# Altium PCB EP_PCBnoPP.PcbDoc
Units mil, origin at the board's own origin, x right, y up, seen from the top; angles counter-clockwise.
Board outline 4724.41 x 4724.41 mil, 4 copper layers (Top Layer 1, Top Layer, Bottom Layer, Bottom Layer 1), stack 74.148 mil thick; 51 components, 36 nets, 161 pads, 56 vias.
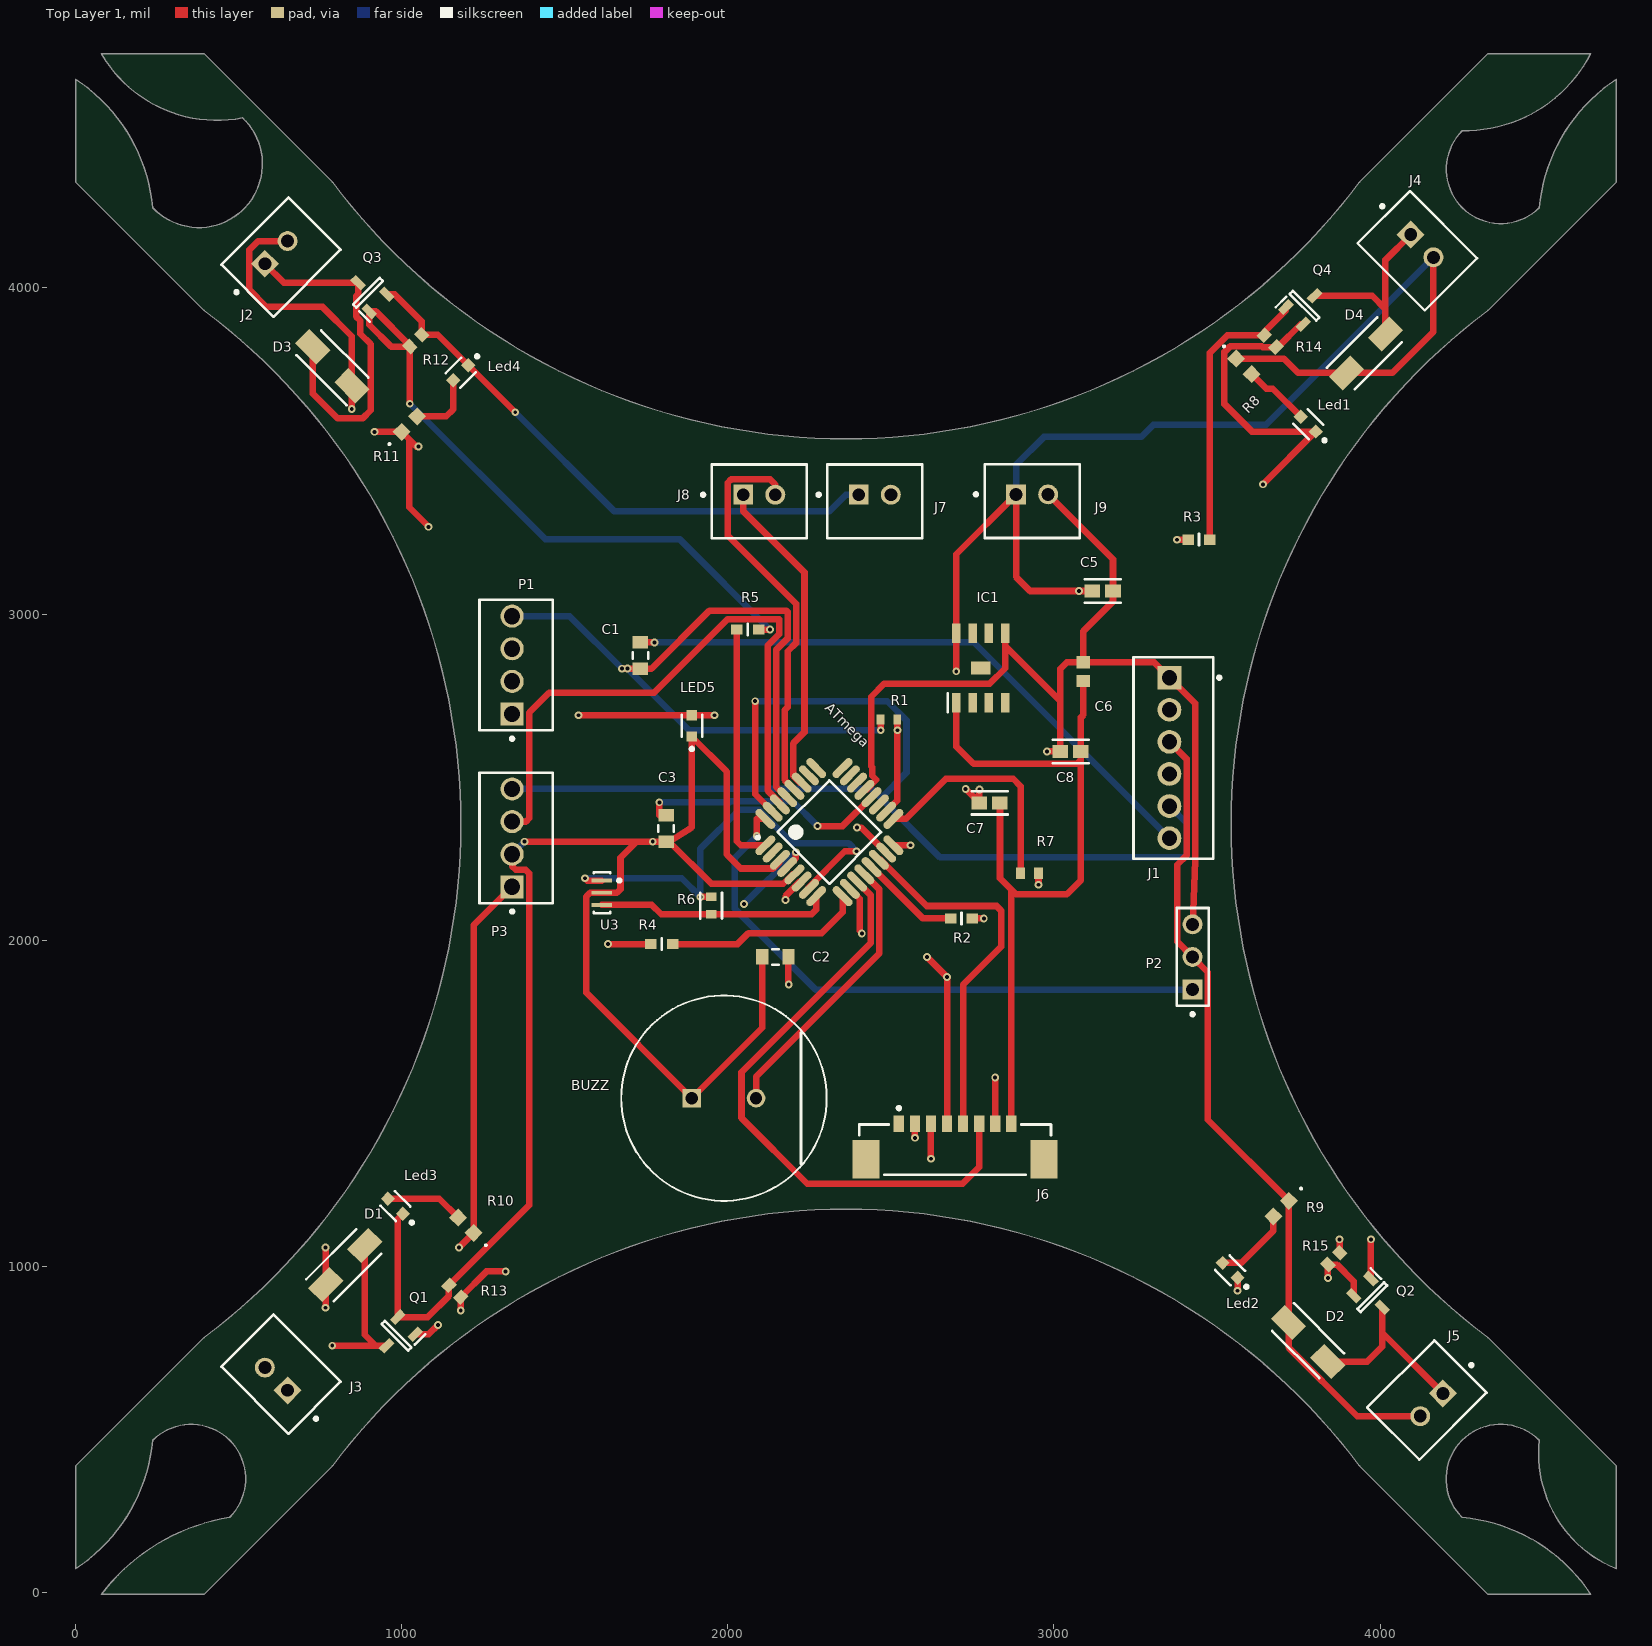
[diagram p0: Top Layer 1 view]
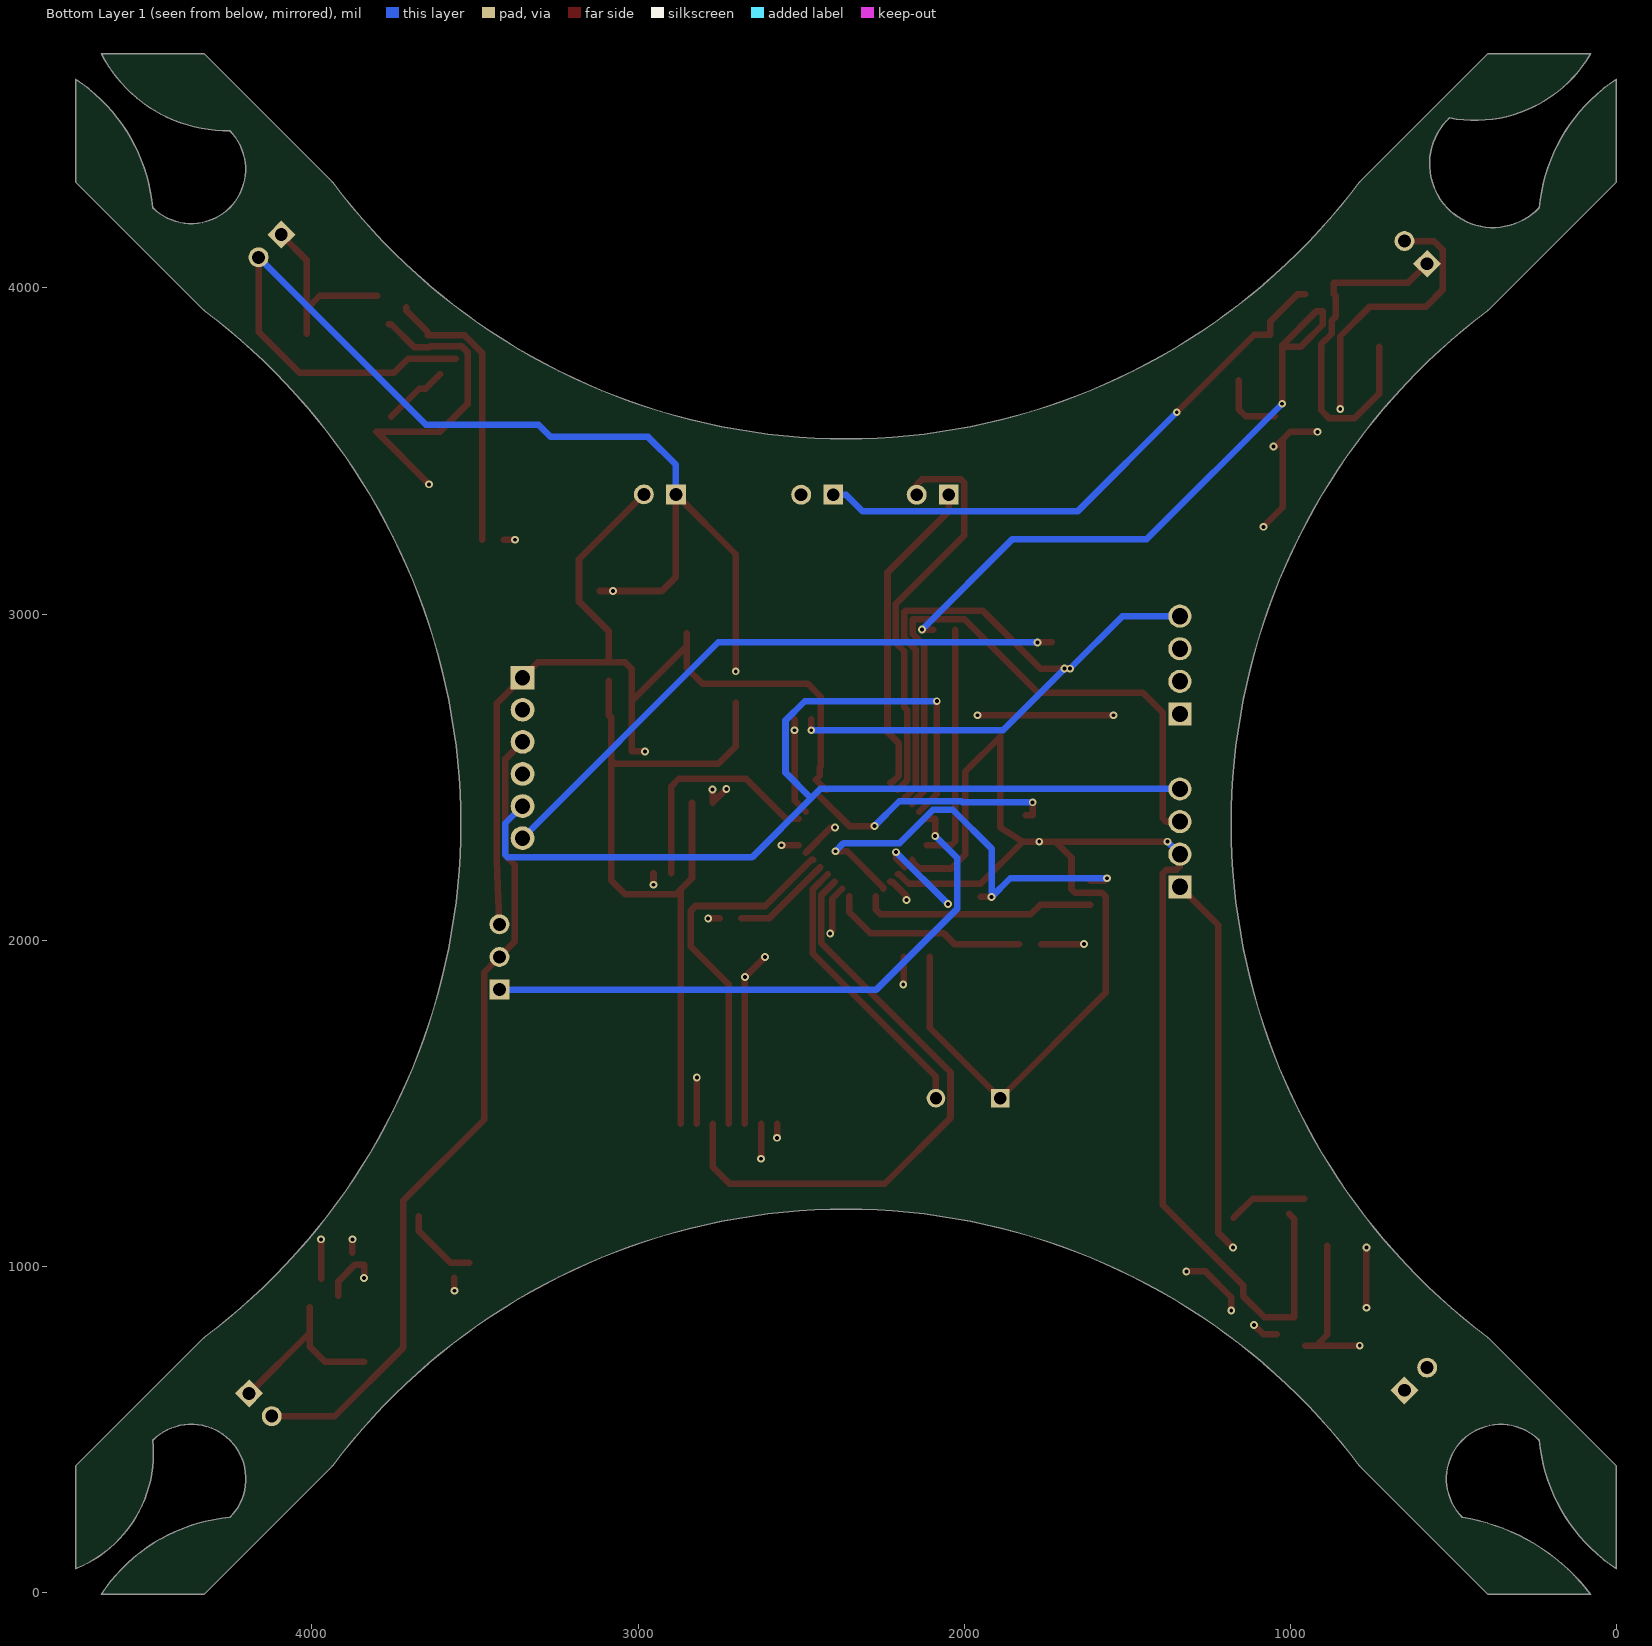
[diagram p1: Bottom Layer 1 view, seen from below]
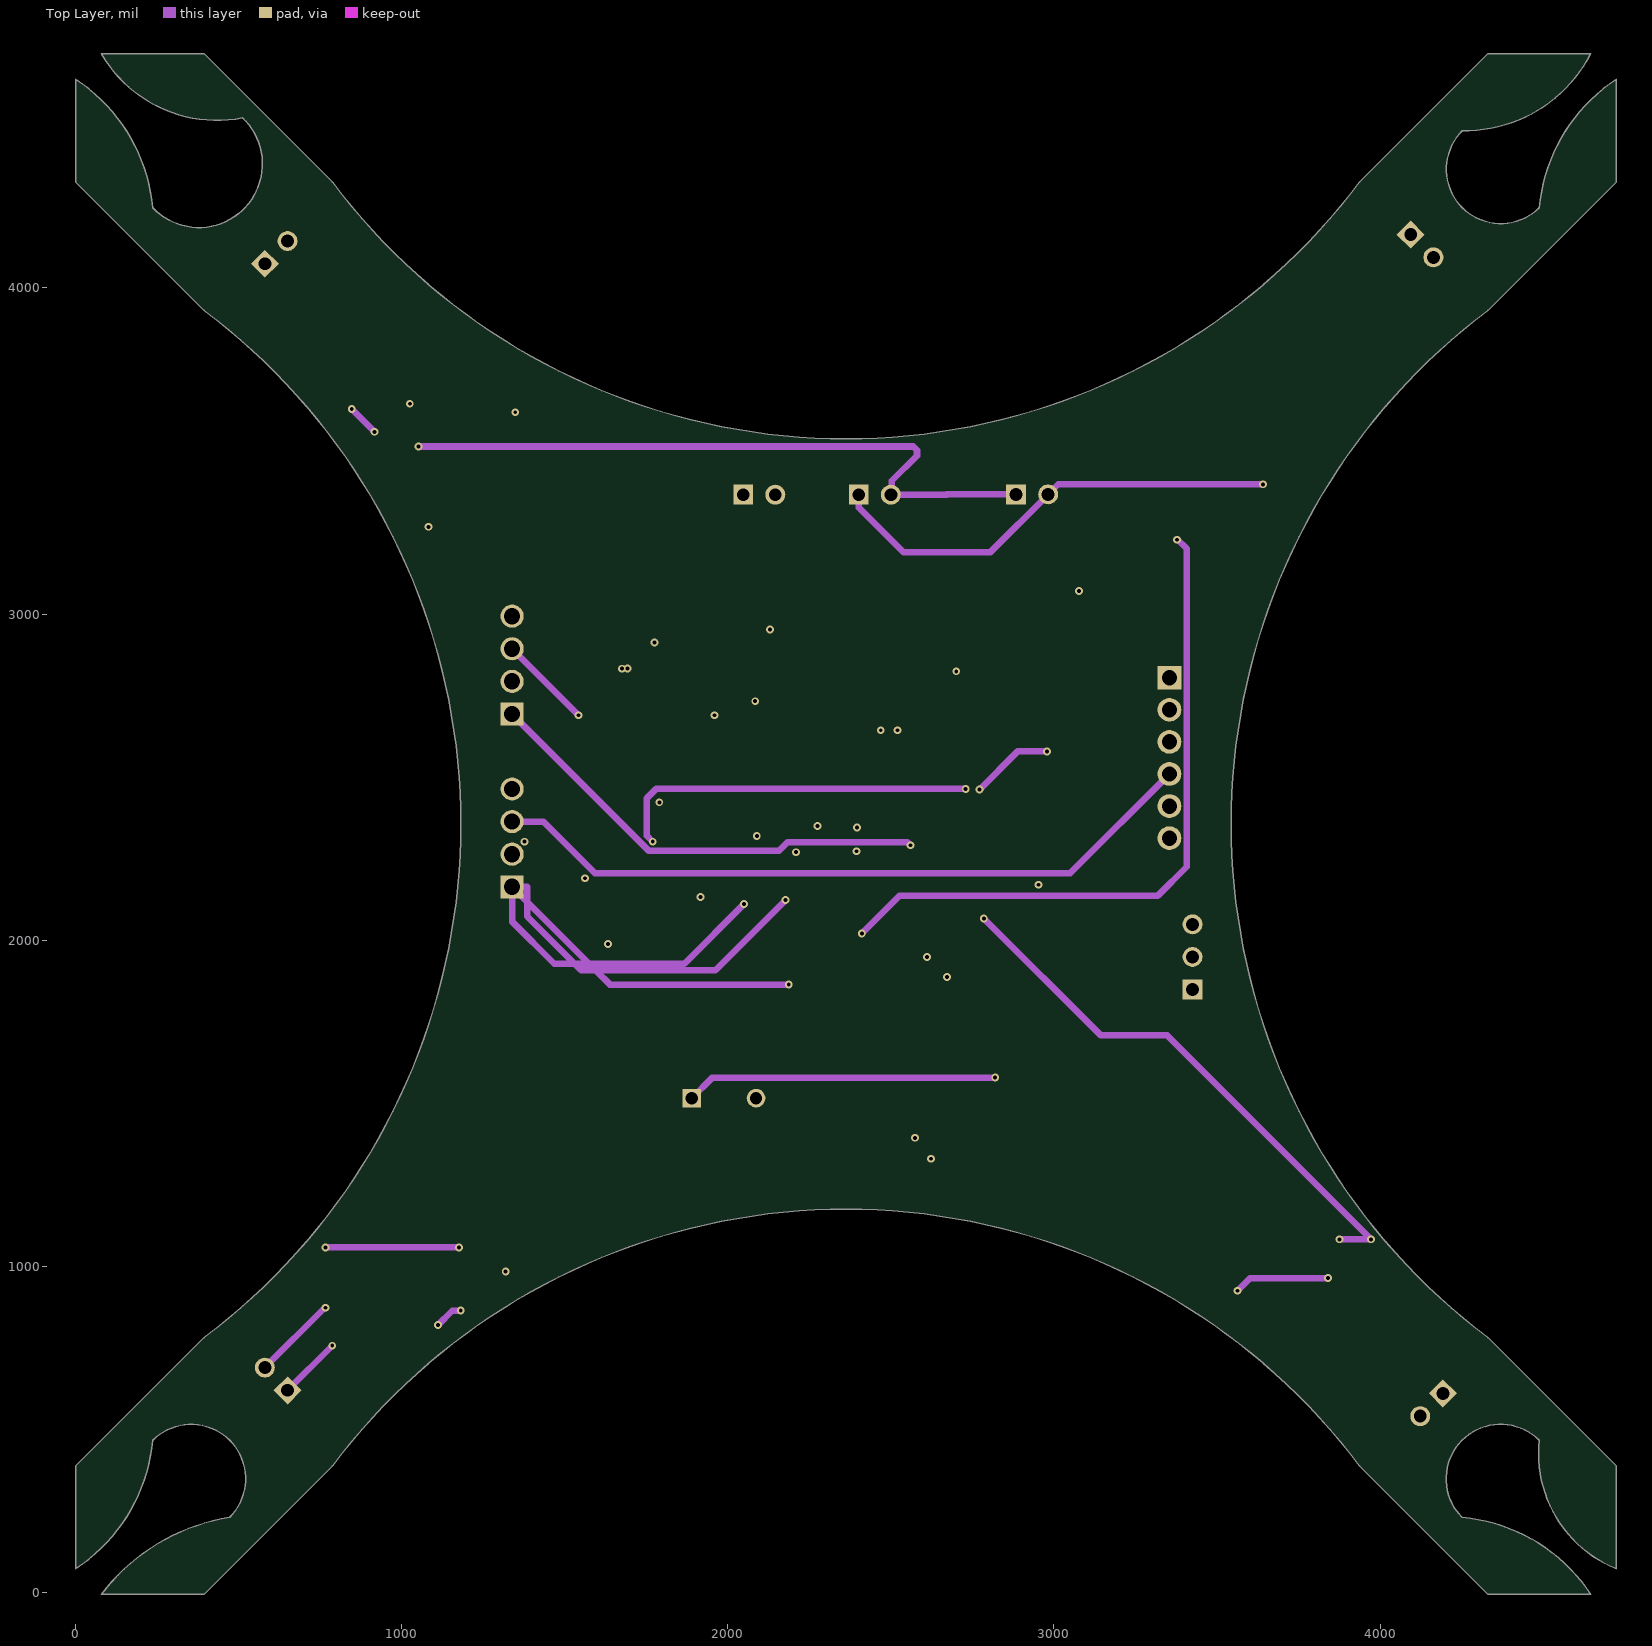
[diagram p2: Top Layer]
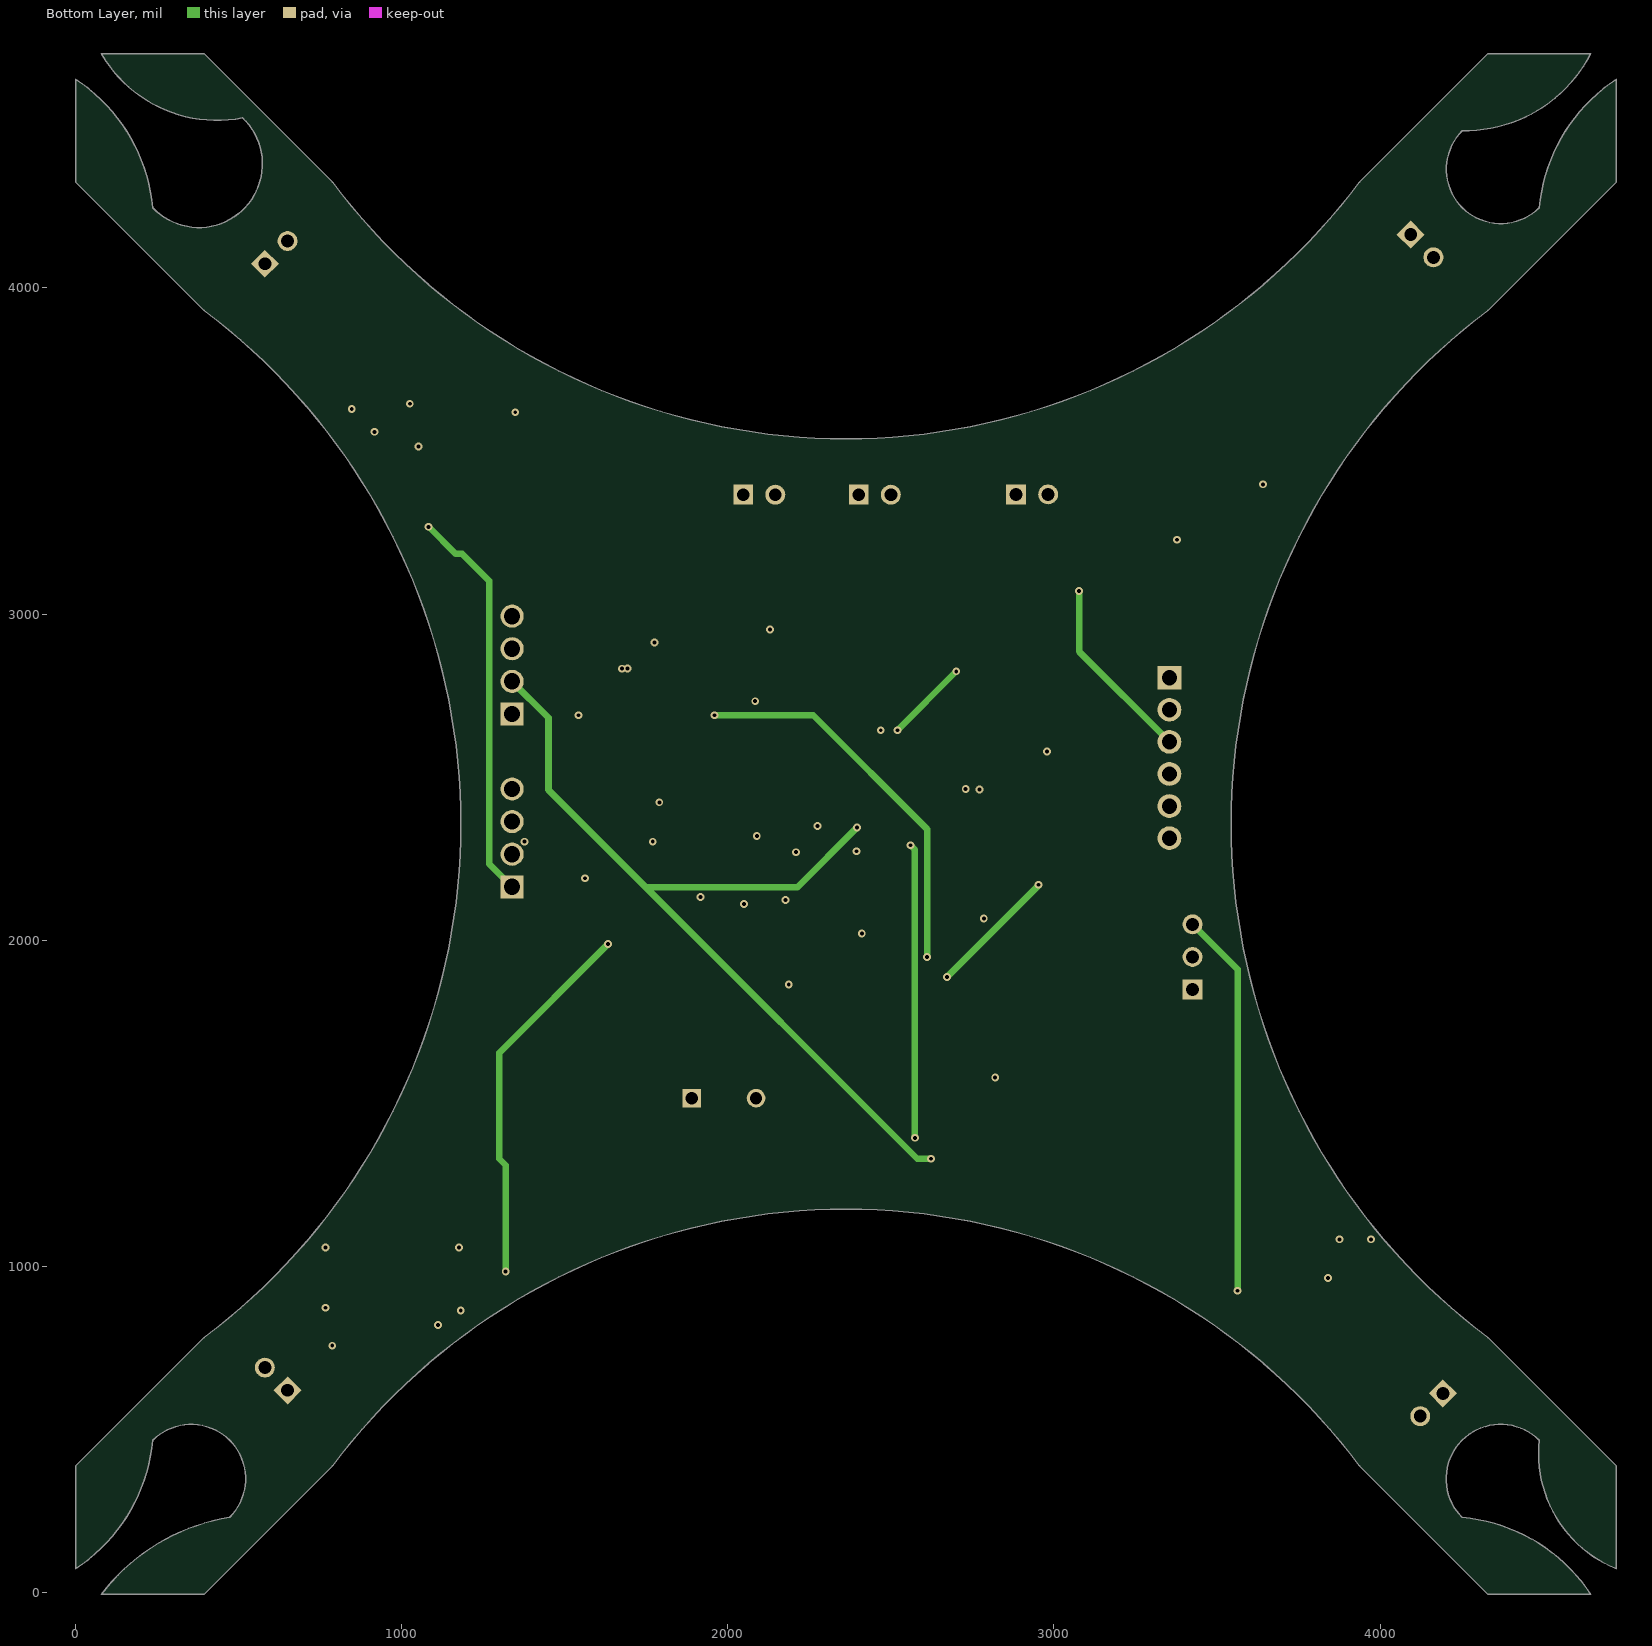
[diagram p3: Bottom Layer]
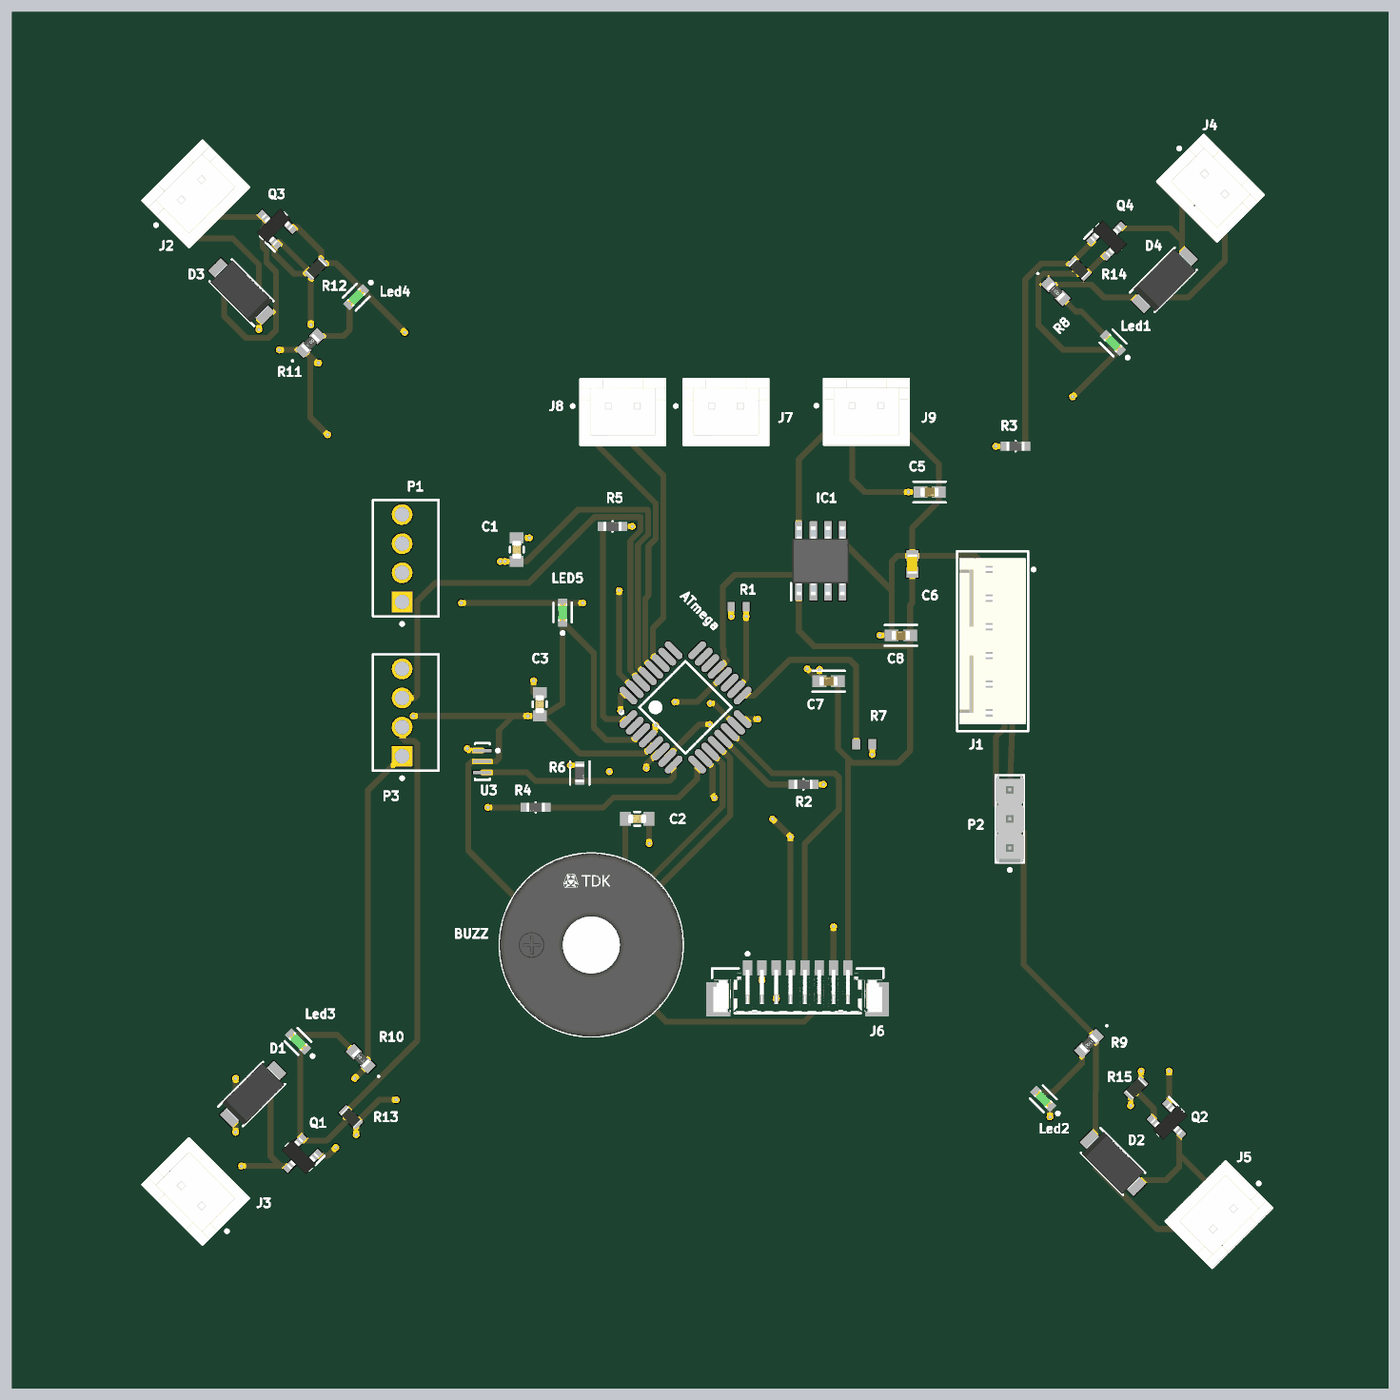
[diagram p4: 3D render of the assembled board from above, using the file's embedded part models]

## Layer stack, top to bottom
Top Solder: solder mask 1, SM-002, Dk 4
Top Layer 1: signal copper 1.378
Dielectric 2: prepreg 2.8, PP-006, Dk 4.1
Top Layer: signal copper 1.4
Dielectric 1: dielectric 62.992, FR-4, Dk 4.8
Bottom Layer: signal copper 1.4
Dielectric 3: prepreg 2.8, PP-006, Dk 4.1
Bottom Layer 1: signal copper 1.378
Bottom Solder: solder mask 1, SM-002, Dk 4

## Board outline
78.99,-5.81 cw(c571.12,-379.83) 472.69,230.41 ccw(c354.58,348.52) 236.47,466.63 cw(c-289.4,514.43) 0.25,72.93 0.25,387.89 393.95,781.59 ccw(c-787.15,2356.39) 393.95,3931.19 0.25,4324.9 0.25,4639.86 cw(c-289.4,4198.35) 236.47,4246.16 ccw(c378.01,4380.2) 512.06,4521.75 cw(c433.32,4923.32) 78.99,4718.6 393.95,4718.6 787.65,4324.9 ccw(c2362.45,5506) 3937.26,4324.9 4330.96,4718.6 4645.92,4718.6 cw(c4259.31,4916.75) 4252.22,4482.38 ccw(c4370.33,4364.27) 4488.44,4246.16 cw(c5014.31,4198.35) 4724.66,4639.86 4724.66,4324.9 4330.96,3931.19 ccw(c5512.06,2356.39) 4330.96,781.59 4724.66,387.89 4724.66,72.93 cw(c4866.03,425.47) 4488.44,466.63 ccw(c4369.97,348.52) 4251.86,230.05 cw(c4206.28,-293.23) 4645.92,-5.81 4330.96,-5.81 3937.26,387.89 ccw(c2362.45,-793.21) 787.65,387.89 393.95,-5.81

## Design rules (kind name [scope] priority, off if disabled: settings)
Clearance [All] p1: gap=6 ignorepadtopadclearanceinfootprint=FALSE
PolygonConnect [All] p1: connectstyle=Relief reliefconductorwidth=10 reliefentries=4 polygonreliefangle="90 Angle" airgapwidth=10
RoutingVias [All] p1: holewidth=12 width=24 viastyle="Through Hole" minholewidth=12 minwidth=24 maxholewidth=12 maxwidth=24
SolderMaskExpansion [All] p1: expansion=4 istentingtop=FALSE
SupplyNets "Schematic Supply Nets_2" [InNet('3.3v')] p1: voltage=0.000
SupplyNets "Schematic Supply Nets_1" [InNet('VCC')] p2: voltage=0.000
SupplyNets "Schematic Supply Nets" [InNet('GND')] p3: voltage=0.000
Width [All] p1: maxlimit=40 minlimit=12 preferedwidth=20
30 further rules are at their usual default settings.

## Components (designator, comment, footprint, x,y, rotation, side; value= is the part's Value field where it differs from the comment)
ATmega "ATmega328P-AU" 32A_M 2311.49,2331.59 r45 top (schematic designator U2)
BUZZ "SDC1610M5-01" FP-SDC1610M5-01-MFG 1988.19,1515.75 r0 top (schematic designator LS1)
C1 "CGA3E2X7R1H104K080AA" FP-CGA3E-0_3-0_1-IPC_A 1732.28,2873.03 r270 top
C2 "CGA3E2X7R1H104K080AA" FP-CGA3E-0_3-0_1-IPC_A 2145.67,1948.82 r180 top
C3 "CGA3E2X7R1H104K080AA" FP-CGA3E-0_3-0_1-IPC_A 1811.02,2342.52 r90 top
C5 "GRM188R60J106ME47D" FP-GRM188-0_1-e0_2_0_55-IPC_A 3149.61,3070.87 r0 top
C6 "GRM188R71H104KA93D" CAPC1608X90X35ML10T15 3090.55,2823.82 r270 top
C7 "GRM188R60J106ME47D" FP-GRM188-0_1-e0_2_0_55-IPC_A 2803.08,2421.26 r180 top
C8 "GRM188R60J106ME47D" FP-GRM188-0_1-e0_2_0_55-IPC_A 3051.18,2578.74 r180 top
D1 "SS12" DIOM5227X250N 826.77,1003.94 r45 top
D2 "SS12" DIOM5227X250N 3779.53,767.72 r315 top
D3 "SS12" DIOM5227X250N 787.4,3759.84 r135 top
D4 "SS12" DIOM5227X250N 3956.69,3799.21 r45 top
IC1 "HT7333-1" SOIC127P600X175-9N 2775.59,2834.65 r90 top
J1 "22-04-1061" FP-22-04-1061-MFG 3366.14,2559.06 r90 top
J2 "B2B-XH-A(LF)(SN)" FP-B2B-XH-A_LF_SN-MFG 629.92,4094.49 r45 top
J3 "B2B-XH-A(LF)(SN)" FP-B2B-XH-A_LF_SN-MFG 629.92,669.29 r135 top
J4 "B2B-XH-A(LF)(SN)" FP-B2B-XH-A_LF_SN-MFG 4114.17,4114.17 r315 top
J5 "B2B-XH-A(LF)(SN)" FP-B2B-XH-A_LF_SN-MFG 4143.5,590.05 r225 top
J6 "53398-0871" FP-53398-0871-MFG 2696.85,1358.27 r180 top
J7 "B2B-XH-A(LF)(SN)" FP-B2B-XH-A_LF_SN-MFG 2450.79,3345.47 r0 top
J8 "B2B-XH-A(LF)(SN)" FP-B2B-XH-A_LF_SN-MFG 2096.46,3345.47 r0 top
J9 "B2B-XH-A(LF)(SN)" FP-B2B-XH-A_LF_SN-MFG 2933.07,3346.46 r0 top
Led1 "SML-D12U8WT86C" FP-SML-D12-MFG 3779.53,3582.68 r135 top
Led2 "SML-D12U8WT86C" FP-SML-D12-MFG 3540.03,987.53 r135 top
Led3 "SML-D12U8WT86C" FP-SML-D12-MFG 980.97,1184.38 r135 top
Led4 "SML-D12U8WT86C" FP-SML-D12-MFG 1181.1,3740.16 r225 top
LED5 "SML-D12U8WT86C" FP-SML-D12-MFG 1889.76,2657.48 r90 top
P1 "640456-4" TECO-640456-4 1338.58,2843.7 r270 top
P2 "22-28-4033" MOLX-22-28-4033_V 3425.2,1948.82 r90 top
P3 "640456-4" TECO-640456-4 1338.58,2313.78 r270 top
Q1 "SI2302-TP" SOT95P237X125-3N 984.25,787.4 r225 top
Q2 "SI2302-TP" SOT95P237X125-3N 3976.38,905.51 r315 top
Q3 "SI2302-TP" SOT95P237X125-3N 896.77,3985.12 r135 top
Q4 "SI2302-TP" SOT95P237X125-3N 3768.59,3945.75 r45 top
R1 "RC0603FR-1010KL" RESC1608X55X25LL10T15 2494.09,2677.17 r0 top
R2 "RC0603FR-07100RL" FP-RC0603-0_55-MFG 2716.54,2066.93 r0 top
R3 "RC0603FR-07100RL" FP-RC0603-0_55-MFG 3444.88,3228.35 r0 top
R4 "RC0603FR-07100RL" FP-RC0603-0_55-MFG 1797.24,1988.19 r180 top
R5 "RC0603FR-07100RL" FP-RC0603-0_55-MFG 2061.02,2952.76 r0 top
R6 "RC0603JR-071ML" FP-RC0603-0_55-IPC_C 1948.82,2106.3 r270 top
R7 "RC0603FR-07330RL" RESC1608X55X25NL10T15 2925.2,2204.72 r0 top
R8 "TFCR0603-16W-E-3300BT" TFCR0603 3582.68,3759.84 r315 top
R9 "TFCR0603-16W-E-3300BT" TFCR0603 3696.81,1177.12 r225 top
R10 "TFCR0603-16W-E-3300BT" TFCR0603 1196.81,1126.03 r135 top
R11 "TFCR0603-16W-E-3300BT" TFCR0603 1023.62,3582.68 r45 top
R12 "CRCW060310K0FKEA" RESC1609X50X30NL8T20 1043.31,3838.58 r45 top
R13 "CRCW060310K0FKEA" RESC1609X50X30NL8T20 1163.01,923.61 r135 top
R14 "CRCW060310K0FKEA" RESC1609X50X30NL8T20 3663.01,3836.99 r315 top
R15 "CRCW060310K0FKEA" RESC1609X50X30NL8T20 3858.27,1023.62 r225 top
U3 "CSTCE16M0V53-R0" MURA-CSTCE_V-3_V 1614.17,2145.67 r270 top

## Footprints (in the part's own frame and the unit in brackets; to place one, negate y for a bottom-side part, rotate by r counter-clockwise, add the part's x,y. Pads: shape width x height; smd on the part's side, far side on the other; paste and mask are expansions set on the pad)
32A_M [mm] "Thin QFP, 32-Leads, Body 7x7mm, Pitch 0.8mm, IPC Low Density"
  oval 1.95x0.6 smd: 1(-4.25,2.8) 2(-4.25,2) 3(-4.25,1.2) 4(-4.25,0.4) 5(-4.25,-0.4) 6(-4.25,-1.2) 7(-4.25,-2) 8(-4.25,-2.8) 17(4.25,-2.8) 18(4.25,-2) 19(4.25,-1.2) 20(4.25,-0.4) 21(4.25,0.4) 22(4.25,1.2) 23(4.25,2) 24(4.25,2.8)
  oval 0.6x1.95 smd: 9(-2.8,-4.25) 10(-2,-4.25) 11(-1.2,-4.25) 12(-0.4,-4.25) 13(0.4,-4.25) 14(1.2,-4.25) 15(2,-4.25) 16(2.8,-4.25) 25(2.8,4.25) 26(2,4.25) 27(1.2,4.25) 28(0.4,4.25) 29(-0.4,4.25) 30(-1.2,4.25) 31(-2,4.25) 32(-2.8,4.25)
  silkscreen extent -4.37,-2.85 2.85,3.77, body extent -3.5,-3.5 3.5,3.5, height 1.2
CAPC1608X90X35ML10T15 [mm] "Chip Capacitor, 2-Leads, Body 1.7x0.9mm, IPC Low Density"
  rect 0.95x1.05 smd: 1(-0.725,0) 2(0.725,0)
  body extent -0.85,-0.45 0.85,0.45, height 0.9
DIOM5227X250N [mm]
  rect 2.35x1.55 smd: 1(-2.15,0) 2(2.15,0)
  silkscreen extent -2.93,-1.36 2.6,1.36, body extent -2.6,-1.36 2.6,1.36, height 2.5
FP-22-04-1061-MFG [mm]
  rect 1.85x1.85 hole 1.2 paste-2539.97 mask+0: 1(6.25,0.3)
  round 1.85 hole 1.2 paste-2539.97 mask+0: 2(3.75,0.3) 3(1.25,0.3) 4(-1.25,0.3) 5(-3.75,0.3) 6(-6.25,0.3)
  silkscreen extent -7.85,-3.7 7.85,3.1, body extent -7.95,-3.2 7.95,3.2, height 0.25
FP-53398-0871-MFG [mm]
  rect 0.8x1.3 smd paste+0 mask+0: 1(4.375,-2) 2(3.125,-2) 3(1.875,-2) 4(0.625,-2) 5(-0.625,-2) 6(-1.875,-2) 7(-3.125,-2) 8(-4.375,-2)
  rect 2.1x3 smd paste+0 mask+0: 9(-6.925,0.75) 10(6.925,0.75)
  silkscreen extent -7.48,-3.35 7.48,1.95, body extent -8.08,-2.75 8.08,2.35, height 0.25
FP-B2B-XH-A_LF_SN-MFG [mm]
  rect 1.55x1.55 hole 1 paste-2539.97 mask+0: 1(-1.25,0.525)
  round 1.55 hole 1 paste-2539.97 mask+0: 2(1.25,0.525)
  silkscreen extent -4.5,-2.88 3.7,2.88, body extent -3.8,-2.98 3.8,2.98, height 0.25
FP-CGA3E-0_3-0_1-IPC_A [mm]
  rect 0.956x1.206 smd paste+0 mask+0: 1(-1.025,0) 2(1.025,0)
  silkscreen extent -0.25,-0.6 0.25,0.6, body extent -2,-1.1 2,1.1, height 0.25
FP-GRM188-0_1-e0_2_0_55-IPC_A [mil]
  rect 47.57x39.85 smd paste+0 mask+0: 1(-31.57,0) 2(31.57,0)
  silkscreen extent -55,-36 55,36, body extent -75,-40 75,40, height 10
FP-RC0603-0_55-IPC_C [mil]
  rect 25.93x31.97 smd paste+0 mask+0: 1(-26.64,0) 2(26.64,0)
  silkscreen extent -40,-33 40,33, body extent -44,-22 44,22, height 10
FP-RC0603-0_55-MFG [mm]
  rect 0.9x0.8 smd paste+0 mask+0: 1(-0.85,0) 2(0.85,0)
  silkscreen extent 0,-0.45 0,0.45, body extent -1.4,-0.55 1.4,0.55, height 0.25
FP-SDC1610M5-01-MFG [mm]
  rect 1.45x1.45 hole 0.95 paste-2539.97 mask+0: 1(-2.5,0)
  round 1.45 hole 0.95 paste-2539.97 mask+0: 2(2.5,0)
  silkscreen extent -8,-8 8,8, body extent -8.1,-8.1 8.1,8.1, height 0.25
FP-SML-D12-MFG [mm]
  rect 0.8x0.8 smd paste+0 mask+0: 1(-0.825,0) 2(0.825,0)
  silkscreen extent -1.92,-0.8 0.85,0.8, body extent -1.33,-0.55 1.33,0.55, height 0.25
MOLX-22-28-4033_V [mm] "THD, 3-Leads, Body 7.62x2.49mm, Pitch 2.54mm"
  rect 1.55x1.55 hole 1.02: 1(-2.54,0)
  round 1.55 hole 1.02: 2(0,0) 3(2.54,0)
  silkscreen extent -4.58,-1.24 3.81,1.24, body extent -3.81,-1.24 3.81,1.24, height 8.38
MURA-CSTCE_V-3_V [mm] "SMD, 3-Leads, Body 3.2x1.3mm, Pitch 0.95mm"
  rect 0.3x1.6 smd: 1(-0.95,0) 2(0,0) 3(0.95,0)
  silkscreen extent -1.6,-0.65 1.6,1.48, body extent -1.6,-0.65 1.6,0.65, height 1
RESC1608X55X25LL10T15 [mm] "Chip Resistor, 2-Leads, Body 1.60x0.80mm, IPC High Density"
  rect 0.6x0.8 smd: 1(-0.65,0) 2(0.65,0)
  body extent -0.85,-0.45 0.85,0.45, height 0.55
RESC1608X55X25NL10T15 [mm] "Chip Resistor, 2-Leads, Body 1.70x0.90mm, IPC Medium Density"
  rect 0.7x0.9 smd: 1(-0.7,0) 2(0.7,0)
  body extent -0.85,-0.45 0.85,0.45, height 0.55
RESC1609X50X30NL8T20 [mm] "Chip Resistor, 2-Leads, Body 1.65x0.95mm, IPC Medium Density"
  rect 0.8x0.95 smd: 1(-0.65,0) 2(0.65,0)
  body extent -0.82,-0.47 0.82,0.47, height 0.5
SOIC127P600X175-9N [mm]
  rect 1.5x0.65 smd: 1(-2.7,1.905) 2(-2.7,0.635) 3(-2.7,-0.635) 4(-2.7,-1.905) 5(2.7,-1.905) 6(2.7,-0.635) 7(2.7,0.635) 8(2.7,1.905)
  rect 1x1.5 smd: 9(0,0)
  silkscreen extent -3.45,2.58 -1.95,2.58, body extent -3,-2.45 3,2.45, height 1.75
SOT95P237X125-3N [mm]
  rect 1.15x0.6 smd: 1(-1.1,0.95) 2(-1.1,-0.95) 3(1.1,0)
  silkscreen extent -1.68,-1.46 0.18,1.5, body extent -1.25,-1.5 1.25,1.5, height 1.07
TECO-640456-4 [mm] "Through Hole, 4-Leads, Body 10.16x5.72mm, Pitch 2.54mm"
  rect 1.8x1.8 hole 1.27 paste-2539.97: 1(3.81,0)
  round 1.8 hole 1.27 paste-2539.97: 2(1.27,0) 3(-1.27,0) 4(-3.81,0)
  silkscreen extent -5.08,-2.54 5.86,3.18, body extent -5.08,-2.54 5.08,3.18, height 10.03
TFCR0603 [mm]
  rect 1x1 smd: 1(-0.85,0) 2(0.85,0)
  silkscreen extent -2.25,-0.05 -2.15,0.05, body extent -0.77,-0.39 0.77,0.39, height 0.46

## Part data
ATmega: library part CMP-0095-00269-2, "8-bit AVR Microcontroller, 32KB Flash, 1KB EEPROM, 2KB SRAM, 32-pin TQFP, Industrial Grade (-40°C to 85°C)", Code_JEDEC=MS-026-ABA, ComponentLink1Description="Manufacturer URL", ComponentLink1URL=http://www.atmel.com/, ComponentLink2Description="ATmega48A/48PA/88A/88PA/168A/168PA/328/328P Datasheet", ComponentLink2URL=http://www.atmel.com/dyn/resources/prod_documents/doc8271.pdf, ComponentLink3Description="ATmega48A/48PA/88A/88PA/168A/168PA/328/328P Summary", ComponentLink3URL=http://www.atmel.com/dyn/resources/prod_documents/8271S.pdf, DatasheetVersion="revD, May-2011", PackageDescription="32-Lead, 7x7x1.0 mm Body, 0.8mm Lead Pitch, Thin Profile Plastic Quad Flat Package (TQFP)", PackageReference=32A, PackageVersion="revC, Oct-2010", RevisionNote="DatasheetVersion & PackageVersion updated. URLs added."
BUZZ: library part CMP-08413-000008-1, "AUDIO MAGNETIC INDICATOR 4-8V TH", Frequency=2.4kHz, Max Operating Temperature=70°C, Max Supply Current=30mA, Min Operating Temperature=-10°C, Nominal Supply Voltage (DC)=5V, Diameter=16mm, Height=10mm, Input Type=DC, Lead Free="Lead Free", Mount="Through Hole", Number of Pins=2, Number of Terminals/Pins=2, Operating Supply Current=30mA, Packaging=Tray, Sensing Method=Magnetic, Series=SDC, Termination="PC Pins", Voltage Rating=5V
C1 C2 C3: library part CMP-2000-07546-2, "Cap Ceramic 100nF 50V X7R 10% Pad SMD 0603 +125°C Automotive T/R", Capacitance=100nF, Case Code (Imperial)=0603, Case Code (Metric)=1608, Dielectric=X7R, Max Operating Temperature=125°C, Min Operating Temperature=-55°C, Package Quantity=1, Ratings=AEC-Q200, Tolerance=10%, Voltage=50V, Case/Package=0603, Composition=Ceramic, Depth=0.8mm, Height=0.8mm, Lead Free="Lead Free", Length=1.6mm, Mount="Surface Mount", Packaging="Tape and Reel", Radiation Hardening=No, REACH SVHC="No SVHC", Termination=SMD/SMT, Thickness=0.035inch, Voltage Rating=50V, Voltage Rating (DC)=50V, Weight=7.1E-05oz, Width=0.8mm
C5 C7 C8: library part CMP-2006-02792-2, "Chip Multilayer Ceramic Capacitors for General Purpose, 0603, 10uF, X5R, 15%, 20%, 6.3V", Capacitance=10uF, Case Code (Imperial)=0603, Case Code (Metric)=1608, Dielectric=X5R, Max Operating Temperature=85°C, Min Operating Temperature=-55°C, Package Quantity=4000, Tolerance=20%, Voltage=6.3V, Case/Package=0603, Depth=0.8mm, Height=0.8mm, Lead Free="Lead Free", Length=1.6mm, Material=Ceramic, Mount="Surface Mount", Packaging="Tape and Reel", Radiation Hardening=No, REACH SVHC="No SVHC", Termination=SMD/SMT, Thickness=0.035inch, Voltage Rating=6.3V, Voltage Rating (DC)=6.3V, Width=0.031inch
C6: library part CMP-2100-03643-1, "Chip Capacitor, 0.1 uF, +/- 10%, 50 V, -55 to 125 degC, 0603 (1608 Metric), RoHS, Tape and Reel", Capacitance=100nF, Case Code (Imperial)=0603, Case Code (Metric)=1608, Dielectric=X7R, Dielectric Material=Ceramic, Insulation Resistance=10GR, Manufacturer=Murata, Max Operating Temperature=125degC, Min Operating Temperature=-55degC, Package Description="2-Pin Surface Mount Device, Body 1.6 x 0.8 mm", Package Quantity=1, Tolerance=10%, Voltage=50V, Case/Package=0603, Contact Plating=Tin, Datasheet URL=http://psearch.en.murata.com/capacitor/product/GRM188R71H104KA93%23.pdf, Datasheet Version=42675.0, Depth=0.8mm, Height=0.8mm, Lead Free=LeadFree, Length=1.6mm, Manufacturer URL=http://www.murata.com/, Material=Ceramic, Mount=SurfaceMount, Number of Pins=2, Package Reference=0603, Packaging=TapeandReel, Radiation Hardening=No, REACH SVHC=NoSVHC, RoHSCompliant=true, Termination=SMD/SMT, Thickness=0.035inch, Voltage Rating=50V, Voltage Rating (DC)=50V, Width=0.8mm
D1 D2 D3 D4: "Schottky Diode", Manufacturer_Name=onsemi, Mouser Part Number=512-SS12, Arrow Part Number=SS12, Arrow Price/Stock=https://www.arrow.com/en/products/ss12/on-semiconductor?utm_currency=USD&region=nac, Datasheet Link=https://datasheet.datasheetarchive.com/originals/distributors/Datasheets-24/DSA-463612.pdf, Height=2.5mm, Manufacturer_Part_Number=SS12, Mouser Price/Stock=https://www.mouser.co.uk/ProductDetail/onsemi-Fairchild/SS12?qs=mVVXn4M53U9WoaEpU1CO0A%3D%3D
IC1: "Integrated Circuit", Manufacturer_Name=Holtek, Datasheet Link=https://www.holtek.com/webapi/116711/HT73xx-1v120.pdf, Height=1.75mm, Manufacturer_Part_Number=HT7333-1
J1: library part CMP-04776-000934-1, "CONN HEADER VERT 6POS 2.5MM", Color=Natural, Contact Resistance=20mR, Current Rating=3A, Flammability Rating="UL94 V-0", Insulation Resistance=1GR, Max Operating Temperature=105°C, Max Voltage Rating (DC)=250.25kV, Min Operating Temperature=-40°C, Package Quantity=1, Voltage Rating=250V, Connector Type="Male Pin", Contact Gender=Male, Contact Material=Brass, Contact Mating Length=0.295inch, Contact Plating=Tin, Contact Type="Male Pin", Fastening Type=Friction, Gender=Male, Glow Wire Compliant=Non-compliant, Halogen Free="Low Halogen", Height=11.7mm, Hole Diameter=1.19mm, Housing Color=Natural, Housing Material=Nylon, Lead Free="Lead Free", Lead Pitch=2.5mm, Length=14.5mm, Mount="Through Hole", Number of Circuits=6, Number of Contacts=6, Number of Poles=6, Number of Positions=6, Number of Rows=1, Orientation=Straight, Packaging=Bulk, Pitch=2.5mm, Radiation Hardening=No, Series="KK® 5045", Termination=Solder, Voltage Rating (AC)=250V, Voltage Rating (DC)=250V, Width=5.8mm, Working Voltage=250V
J2 J3 J4 J5 J7 J8 J9: library part CMP-2000-05888-3, "CONN HEADER VERT 2POS 2.5MM", Color=Natural, Contact Resistance=20mR, Current Rating=3A, Housing Color=White, Insulation Resistance=1GR, Max Operating Temperature=85°C, Max Voltage Rating (AC)=250V, Min Operating Temperature=-25°C, Connector Type="Male Pin", Contact Material=Brass, Contact Plating=Tin, Contact Type="Male Pin", Depth=5.75mm, Fastening Type=Detent, Housing Material=Polyamide, Lead Free="Lead Free", Lead Pitch=2.5mm, Length=7.4mm, Max Current Rating=3A, Max Voltage Rating (DC)=250V, Mount="Through Hole", Number of Contacts=2, Number of Positions=2, Number of Rows=1, Orientation=Straight, Packaging=Bulk, Pitch=2.5mm, REACH SVHC="No SVHC", Series=XH, Termination=Solder, Voltage Rating=250V, Voltage Rating (AC)=250V, Wire/Cable Gauge=22AWG
J6: library part CMP-04776-000009-1, "CONN HEADER SMD 8POS 1.25MM", Ambient Temperature Range High=+105°C, Ambient Temperature Range Low=-40°C, Current Rating=1A, Manufacturer=Molex, Package=0, Temperature="-40°C to +105°C", Voltage Rating=125V, Automotive=No, Category=Conn, ComponentLink2Description=Datasheet, ComponentLink2URL=https://www.molex.com/pdm_docs/ps/PS-51021-024-001.pdf, Conn Gender=Male, Conn Orientation=Vertical, Contact Material=Tin,Nickel, Device Class L1=Connectors, Device Class L2="Headers and Wire Housings", Device Class L3=unset, Digikey Description="CONN HEADER SMD 8POS 1.25MM", Footprint Url=https://www.molex.com/pdm_docs/sd/533980871_sd.pdf, Height=4.9mm, Lead Free=Yes, Manufacturer Part Number=53398-0871, Mouser Description="Headers & Wire Housings VERTICAL HDR SMT 8P", Number of Contacts=8, Number of Rows=1, Octopart=https://octopart.com/53398-0871-molex-655298, Pitch=1.25mm, RoHS=TRUE, Standoff Height=0.05mm, Temperature Range High=+105°C, Temperature Range Low=-40°C
Led1 Led2 Led3 Led4 LED5: library part CMP-08952-000014-1, "LED RED 1608 SMD", Colour=Red, Forward Current=20mA, Forward Voltage=2.2V, Manufacturer=Rohm, Package=SML-D12, Power Dissipation=54mW, Reverse Voltage=5V, Temperature="-40°C to +85°C", Temperature Range High=+85°C, Temperature Range Low=-40°C, Automotive=Yes, Automotive Grade="Grade 3", Category=Diode, ComponentLink2Description=Datasheet, ComponentLink2URL=https://fscdn.rohm.com/en/products/databook/datasheet/opto/led/chip_mono/sml-d12x8(c)-e.pdf, Device Class L1=Optoelectronics, Device Class L2=LEDs, Device Class L3=unset, Digikey Description="LED RED 1608 SMD", Height=0.65mm, Lead Free=Yes, Led Orientation="Top View", Luminous Intensity=63mcd, Manufacturer Part Number=SML-D12U8WT86C, Mouser Description="LED Uni-Color Red Automotive 2-Pin Chip 0603(1608Metric) T/R", Octopart=https://octopart.com/sml-d12u8wt86c-rohm-77740214, RoHS=TRUE, Wavelength=620nm
P1 P3: library part CMP-2000-05419-1, "Male Header, Pitch 2.54 mm, 1 x 4 Position, Height 10.03 mm, Tail Length 3.56 mm, RoHS, Bulk", Color=White, Current, Rating="5 /  / A", Flammability Rating=UL94V-0, Manufacturer="TE Connectivity", Temperature, Operating="-55to+105 /  / degC", Voltage, Rating="250 /  / V", Agency Approvals=CSA,UL, Angle=Straight, Brand/Series=MTA-100Series, Color, Housing=White, Connector Type=MTA-100, Contact Centerline Spacing="0.100 /  / in.", Contact Mating Area Plating=Tin, Contact Plating=Tin, Contact Shape=Square, Contact Termination Area Plating=Tin, Datasheet URL=https://datasheet.ciiva.com/16286/eng-ds-82056-mta-0608-16286228.pdf, Datasheet Version=Dec-14, Length, Overall="0.4 /  / \"", Length, Pin="0.14 /  / \"", Length, Terminal Post="0.14 /  / in.", Manufacturer URL=http://www.te.com/, Material, Contact=CopperAlloy, Material, Housing=Polyester, Mount Angle=Vertical, Mounting Hole Size="0.04 /  / \"", Mounting Type=PCMount, Number of Contacts=4, Number of Positions=4, Number of Rows=1, Pin Spacing="0.1 /  / \"", Primary Type=InterconnectSystem, Size, Post="0.025 /  / in.", Special Features=Pinstrip, Standards=RoHSCompliant,ELVCompliant,UL94V-0, Termination=Solder, Type=PCBPlug
P2: library part CMP-1676-00001-5, "Male Header, Pitch 2.54 mm, 1 x 3 Position, Height 8.38 mm, Tail Length 3.18 mm, RoHS, Bulk", Colour=Black, Current Rating="4 A", Manufacturer=Molex, Max Operating Temperature="75 degC", Min Operating Temperature="0 degC", Package Quantity=1, Voltage Rating="250 V", ComponentLink1Description="Manufacturer URL", ComponentLink1URL=http://www.molex.com/, ComponentLink2Description=Datasheet, ComponentLink2URL=http://www.molex.com/pdm_docs/sd/022284033_sd.pdf, Contact Finish=Gold, Contact Material=Brass, Contact Plating=Gold, DatasheetVersion="Rev. G, 01/2012", Height="8.38 mm", Lead Pitch="0.1 inch", Length="7.62 mm", Mount="Through Hole", Mounting Technology="Through Hole", PackageDescription="Male Header, Pitch 2.54 mm, 1 x 3 Position, Height 8.38 mm, Tail Length 3.18 mm", PackageReference=22-28-4033, Packaging=Bulk, Pins=3, REACH SVHC=Unknown, RoHSCompliant=true, Rows=1
Q1 Q2 Q3 Q4: "MOSFET (N-Channel)", Manufacturer_Name=MCC, Mouser Part Number=833-SI2302-TP, Arrow Part Number=SI2302-TP, Arrow Price/Stock=https://www.arrow.com/en/products/si2302-tp/micro-commercial-components?utm_currency=USD&region=asia, Datasheet Link=https://www.mccsemi.com/pdf/Products/SI2302(SOT-23).pdf, Height=1.25mm, Manufacturer_Part_Number=SI2302-TP, Mouser Price/Stock=https://www.mouser.co.uk/ProductDetail/Micro-Commercial-Components-MCC/SI2302-TP?qs=SdqRYZZ9IxDSgX7NLuKaFg%3D%3D
R1: library part CMP-2000-06948-1, "Chip Resistor, 10 kOhm, +/- 1%, 0.1 W, -55 to 155 degC, 0603 (1608 Metric), RoHS, Tape and Reel", Case Style=Molded, Manufacturer=Yageo, Operating Temp Range=-55Cto155C, Package / Case=0603, Package Description="2-Pin Surface Mount Device, Body 1.6 x 0.8 mm", Power Rating(s)=1/10W, Resistance=10kohm, Temperature Coefficient=±100, Tolerance (+ or -)=1%, Construction=Rectangular, Datasheet URL=http://www.yageo.com/documents/recent/PYu-RC_Group_51_RoHS_L_7.pdf, Datasheet Version="Rev. 7, 05/2017", Failure Rate=NotRequired, Manufacturer URL=http://www.yageo.com/, Military Standard=NotRequired, Mounting Technology=SurfaceMount, Package Reference=0603, Packaging=TapeandReel, Product Depth (mm)=0.8mm, Product Height (mm)=0.45mm, Product Length (mm)=1.6mm, Termination Style=NotRequired, Type=ThickFilm
R2 R3 R4 R5: library part CMP-2100-03663-2, Case Code (Imperial)=0603, Max Operating Temperature=155°C, Min Operating Temperature=-55°C, Power Rating=100mW, Resistance=100Ω, Temperature Coefficient=100ppm/°C, Tolerance=1%, Voltage Rating=50V, Case Code (Metric)=0603, Case/Package=0603, Composition="Thick Film", Depth=800µm, Height=450µm, Lead Free="Lead Free", Length=1.6mm, Military Standard=Not, NexarPartId=55402879, Number of Pins=2, Packaging="Tape & Reel", REACH SVHC=Unknown, RoHS=Compliant, Schedule B="8533210045, 8533210045", Termination=SMD/SMT, Voltage Rating (DC)=50V, Width=800µm
R6: library part CMP-2000-06953-2, "RES SMD 1M OHM 5% 1/10W 0603", Case Code (Imperial)=0603, Case Code (Metric)=1608, Max Operating Temperature=155°C, Max Power Dissipation=100mW, Min Operating Temperature=-55°C, Package Quantity=5000, Resistance=1MR, Resistance Tolerance=5%, Resistor Type="Thick Film", Temperature Coefficient=100ppm/°C, Voltage Rating=50V, Case/Package=0603, Construction=Rectangular, Contact Plating=Tin, Depth=0.8mm, Features="Moisture Resistant", Height=0.45mm, Lead Free="Lead Free", Length=1.6mm, Military Standard=Not, Number of Pins=2, Number of Terminations=2, Packaging="Tape and Reel", Power Rating=100mW, Radiation Hardening=No, REACH SVHC="No SVHC", RoHS Compliant=Yes, Series=RC, Size Code=0603, Termination=SMD/SMT, Tolerance=5%, Voltage Rating (DC)=50V, Width=0.8mm
R7: library part CMP-1659-00020-2, "Chip Resistor, 330 Ohm, +/- 1%, 0.1 W, -55 to 155 degC, 0603 (1608 Metric), RoHS, Tape and Reel", Capacitance="47 uF", Case Code (Imperial)=2917, Case Code (Metric)=7343, Max Operating Temperature=125degC, Min Operating Temperature=-55degC, Package Quantity=500, Tolerance=10%, Voltage Rating="16 V", Case/Package=2917, ComponentLink1Description="Manufacturer URL", ComponentLink1URL=http://www.yageo.com/, ComponentLink2Description=Datasheet, ComponentLink2URL=http://www.yageo.com/documents/recent/PYu-RC_Group_51_RoHS_L_04.pdf, DatasheetVersion="Rev. 4, 02/2016", ESR="800 mohm", Height="3.1 mm", Length="7.3 mm", Mount="Surface Mount", PackageDescription="2-Pin Surface Mount Device, Body 1.6 x 0.8 mm", PackageReference=0603, Packaging="Tape and Reel", Pins=2, Radiation Hardening=No, REACH SVHC="No SVHC", RoHSCompliant=True, Voltage Rating (DC)="16 V", Width="4.3 mm"
R8 R9 R10 R11: "Resistor", Manufacturer_Name=Venkel, Datasheet Link=https://page.venkel.com/hubfs/Resources/Datasheets/TFCR-Series.pdf, Height=0.55mm, Manufacturer_Part_Number=TFCR0603-16W-E-3300BT
R12 R13 R14 R15: library part CMP-1666-00005-4, "Chip Resistor, 10 KOhm, +/- 1%, 100 mW, -55 to 155 degC, 0603 (1608 Metric), RoHS, Tape and Reel", Manufacturer="Vishay Semiconductor", Max Operating Temperature="155 degC", Min Operating Temperature="-55 degC", Package Quantity=5000, Voltage Rating="75 V", ComponentLink1Description="Manufacturer URL", ComponentLink1URL=http://www.vishay.com/, ComponentLink2Description=Datasheet, ComponentLink2URL=https://datasheet.ciiva.com/11809/0900766b80d98afc-11809037.pdf, DatasheetVersion=06/2012, Height="0.45 mm", Length="1.55 mm", Mounting Technology="Surface Mount", PackageDescription="2-Pin Surface Mount Device, Body 1.575 x 0.85 mm", PackageReference=0603, Packaging="Tape and Reel", REACH SVHC=Unknown, RoHSCompliant=true
U3: library part CMP-0588-00001-2, "Ceramic Resonator, 16 MHz with Built-in Capacitance, Thickness Expander Mode, Initial Frequency Tolerance +/- 0.5%, Load Capacity 15 pF, -20 to 80 degC, 3.2 x 1.3 x 1 mm SMD, RoHS, Reel", Initial Frequency Tolerance="+/- 0.5%", Load Capacity="15 pF", Manufacturer=Murata, Operating Temperature Range="-20 to 80 degC", Oscillating Frequency="16 MHz", ComponentLink1Description="Manufacturer URL", ComponentLink1URL=http://www.murata.com/, ComponentLink2Description=Datasheet, ComponentLink2URL=http://www.murata.com/products/catalog/pdf/p16e.pdf, DatasheetVersion="Rev. P16E-22", Initial Tolerance="+/- 0.5%", Mounting Technology="Surface Mount", PackageDescription="3-Pin SMD, Body 3.2 x 1.3 mm, Pitch 0.95 mm", PackageReference=CSTCE_V-3, Packing=Reel, PartNumber=CSTCE16M0V53-R0, RoHS=TRUE

## Via types
v1: diameter 24, hole 12, Top Layer 1 to Bottom Layer 1, 56 vias

## Nets (pads, with @x,y where several pads share a name; then routed paths per layer and width w, separated by ;. In a path a pad name is that pad's centre, name@x,y a point inside that pad or via, vN(x,y) a via of type N, cw(c..) or ccw(c..) an arc to the next point about the centre after c; other vN are vias at no path point)
3.3v: C6.2 C7.1 C8.1 IC1.1 J6.8 | length 2394.7
  Top Layer 1 w20: IC1.1 2700.59,2593.94 2753.59,2540.94 3070,2540.94 3082.75,2553.69 ; C7.1 2834.65,2190.29 2869.09,2155.84 ; J6.8 2869.09,2155.84 ; C6.2 3090.55,2690.74 3082.75,2682.94 C8.1 3082.75,2553.69 ; 2869.09,2155.84 2884,2140.94 3040,2140.94 3082.75,2183.69 3082.75,2553.69
GND: ATmega.3 ATmega.5 ATmega.21 BUZZ.1 C2.2 C3.1 C5.2 C6.1 C7.2 C8.2 IC1.5 J1.1 J6.7 J7.1 J9.2 Led1.1 Led2.1 Led3.1 Led4.1 LED5.1 P2.3 P3.2 Q1.2 Q2.2 Q3.2 Q4.2 R12.2 R13.2 R14.2 R15.2 U3.2 | length 17106
  Top Layer 1 w20: Q3.2 977.99,3980.95 1061.4,3897.53 R12.2 1110.52,3856.68 Led4.1 v1(1348.26,3618.94) ; Led3.1 988.43,1145.91 Q1.2 1080,844.47 1144.91,909.38 R13.2 1391,1187.79 1391,2204.94 1380,2215.94 1350,2215.94 1338.58,2227.36 P3.2 ; v1(1376.97,2302.16) 1720,2302.16 ; C2.2 2105.31,1731.3 BUZZ.1 1566,1839.51 1566,2133.94 1577.73,2145.67 U3.2 1660,2145.67 1671,2156.67 1671,2253.16 1720,2302.16 ; ATmega.3 2159.77,2241.47 2138.24,2219.94 2040,2219.94 1997,2262.94 1997,2517 LED5.1@1889.76,2624.24 ; ATmega.5 2199.11,2202.14 2169.91,2172.94 1950,2172.94 C3.1@1820.77,2302.16 ; ATmega.21 2423.88,2461.04 2455,2492.16 2443,2504.16 2443,2529.94 2440,2532.94 2440,2746.94 2480,2786.94 2803.59,2786.94 2850.59,2833.94 2850.59,2902.35 ; v1(2729.51,2463.94) C7.2@2771.51,2421.94 ; C7.2 C7.2@2771.51,2421.94 ; v1(2771.51,2461.77) C7.2@2771.51,2421.94 ; J6.7 v1(2819.88,1578.94) ; IC1.5 2850.59,2902.35 ; v1(2979,2578.94) 2979.2,2578.74 C8.2 3019.61,2733.32 ; J9.2 3181.18,3168.23 C5.2 3181.18,3038.56 3090.55,2947.94 C6.1 ; P2.3 3432.75,2244.42 3432.75,2726.7 J1.1 3307.09,2852.36 C6.1 ; v1(3562.99,925.29) Led2.1 ; v1(3640.72,3397.94) Led1.1 3607.23,3559.71 3523,3643.94 3523,3803.94 3540,3820.94 3637.96,3820.94 3640,3818.9 R14.2 3687,3818.9 3756.79,3888.68 Q4.2 ; v1(3840.17,964.17) R15.2 3867.72,1005.53 3919.31,953.94 Q2.2 ; 1720,2302.16 v1(1770,2302.16) C3.1 C3.1@1820.77,2302.16 ; C3.1@1820.77,2302.16 1889.76,2345.7 LED5.1@1889.76,2624.24 ; LED5.1@1889.76,2624.24 1889.38,2624.62 LED5.1 LED5.1@1889.76,2624.24 ; 2850.59,2902.35 3019.61,2733.32 ; 3019.61,2733.32 3019.61,2831.97 3040,2852.36 C6.1
  Top Layer w20: v1(1770,2302.16) 1752,2320.16 1752,2435.94 1780,2463.94 v1(2729.51,2463.94) ; BUZZ.1 1952.95,1578.94 v1(2819.88,1578.94) ; J7.1 2401.57,3326.77 2539.37,3188.98 2804.13,3188.98 J9.2 3013.09,3397.94 v1(3640.72,3397.94) ; v1(2771.51,2461.77) 2888.68,2578.94 v1(2979,2578.94) ; v1(3562.99,925.29) 3601.86,964.17 v1(3840.17,964.17)
  Bottom Layer w20: P2.3 3562.99,1911.02 v1(3562.99,925.29)
  Bottom Layer 1 w20: P3.2 v1(1376.97,2302.16) ; v1(1348.26,3618.94) 1652.26,3314.94 2311,3314.94 2362.2,3366.14 J7.1
NetC1_1: C1.1 J1.6 | length 1870.7
  Top Layer 1 w20: C1.1 v1(1775.55,2913.38)
  Bottom Layer 1 w20: v1(1775.55,2913.38) 2753.94,2913.38 J1.6
NetC1_2: ATmega.29 C1.2 P1.4 R1.1 | length 2474.3
  Top Layer 1 w20: v1(1676,2832.67) v1@1692.26,2832.67 ; v1(1692,2832.94) v1@1692.26,2832.67 ; ATmega.29 2179.48,2438.77 2148,2470.25 2148,2889.94 2183.21,2925.14 2183.21,3006.94 2179.21,3010.94 1944,3010.94 1765.74,2832.67 C1.2 v1@1692.26,2832.67 ; R1.1 2468.5,2644.43 v1(2469,2643.94)
  Bottom Layer 1 w20: P1.4 1514.97,2993.7 v1(1676,2832.67) ; v1(1692,2832.94) 1881,2643.94 v1(2469,2643.94)
NetC3_2: ATmega.20 C3.2 | length 781.5
  Top Layer 1 w20: v1(1790,2422.94) 1790,2382.88 C3.2 ; v1(2275,2349.94) 2352.11,2349.94 ATmega.20
  Bottom Layer 1 w20: v1(1790,2422.94) 2006,2422.94 2009,2425.94 2199,2425.94 v1(2275,2349.94)
NetD1_2: D1.2 J3.1 Q1.3 | length 681.1
  Top Layer 1 w20: v1(787.01,756.78) 920,756.78 ; D1.2 886.63,790.15 920,756.78 ; Q1.3 920,756.78
  Top Layer w20: J3.1 v1(787.01,756.78)
NetD2_2: D2.2 J5.1 Q2.3 | length 570.6
  Top Layer 1 w20: D2.2 3960.93,707.86 4007,753.94 4007,796.15 ; Q2.3 4007,796.15 ; J5.1 4007,796.15
NetD3_2: D3.2 J2.1 Q3.3 | length 1084.7
  Top Layer 1 w20: J2.1 639.06,4015.75 Q3.3 866.14,3981.02 860,3974.88 860,3912.88 872.94,3899.94 872.94,3859.99 905,3827.94 905,3624.94 880,3599.94 804,3599.94 727.55,3676.39 D3.2
NetD4_2: D4.2 J4.1 Q4.3 | length 570.7
  Top Layer 1 w20: Q4.3 3976.1,3976.38 4016.55,3935.94 ; D4.2 4016.55,3935.94 ; J4.1 4016.55,4086.14 4016.55,3935.94
NetJ1_4: ATmega.30 J1.4 P3.3 | length 4070.8
  Top Layer 1 w20: P3.3 1380.84,2363.78 1391,2373.94 1391,2697.94 1452,2758.94 1774,2758.94 2000,2984.94 2156.21,2984.94 2157.21,2983.94 2157.21,2938.14 2122,2902.94 2122,2459.48 2159.77,2421.71 ATmega.30
  Top Layer w20: P3.3 1434.16,2363.78 1592,2205.94 3050.42,2205.94 J1.4
NetJ1_5: ATmega.31 J1.5 P3.4 | length 3450.3
  Top Layer 1 w20: v1(2084,2732.94) 2084,2447.73 ATmega.31
  Bottom Layer 1 w20: P3.4 2441.16,2463.78 2469.5,2435.44 ; v1(2084,2732.94) 2489,2732.94 2548,2673.94 2548,2513.94 2469.5,2435.44 ; J1.5 3407,2358.75 3407,2261.94 3399,2253.94 2651,2253.94 2469.5,2435.44
NetJ6_2: ATmega.16 J6.2 P1.1 | length 2408.9
  Top Layer 1 w20: ATmega.16 v1(2560.25,2291.22) ; v1(2573.82,1394.12) J6.2
  Top Layer w20: P1.1 1758.35,2273.94 2156.47,2273.94 2183.55,2301.01 2550.46,2301.01 v1(2560.25,2291.22)
  Bottom Layer w20: v1(2560.25,2291.22) 2573.82,2277.66 v1(2573.82,1394.12)
NetJ6_3: ATmega.15 J6.3 P1.2 | length 2971.7
  Top Layer 1 w20: v1(2396.5,2345.44) 2409,2345.44 ATmega.15 ; v1(2623.03,1329.94) J6.3
  Bottom Layer w20: P1.2 1450.24,2682.05 1450.24,2460.7 1749,2161.94 ; v1(2396.5,2345.44) 2213,2161.94 1749,2161.94 ; v1(2623.03,1329.94) 2581,1329.94 1749,2161.94
NetJ6_4: J6.4 LED5.2 P1.3 R7.2 | length 2864.7
  Top Layer 1 w20: v1(1542.32,2689.96) LED5.2 v1(1958.98,2689.96) ; v1(2611,1948.18) v1(2672.24,1886.94) J6.4 ; v1(2952.76,2170.01) R7.2
  Top Layer w20: P1.3 v1(1542.32,2689.96)
  Bottom Layer w20: v1(1958.98,2689.96) 2261.98,2689.96 2611,2340.94 v1(2611,1948.18) ; v1(2672.24,1886.94) 2952.76,2167.45 v1(2952.76,2170.01)
NetJ6_5: ATmega.14 J6.5 | length 1141.5
  Top Layer 1 w20: ATmega.14 2468.42,2246.68 2610.17,2104.94 2824,2104.94 2838,2090.94 2838,1979.94 2721.46,1863.39 J6.5
NetJ6_6: ATmega.11 J6.6 | length 1873.7
  Top Layer 1 w20: ATmega.11 2439,2137.27 2439,1991.94 2042,1594.94 2042,1454.94 2244,1252.94 2720,1252.94 2770.67,1303.6 J6.6
NetJ8_1: ATmega.27 J8.1 | length 989.7
  Top Layer 1 w20: J8.1 2047,3366.14 2047,3315.94 2235.21,3127.73 2235.21,2638.14 2200,2602.94 2200,2504.69 2221.38,2483.31 ATmega.27
NetJ8_2: ATmega.28 J8.2 | length 1243.1
  Top Layer 1 w20: J8.2 2145.67,3397.27 2130,3412.94 2010,3412.94 2000,3402.94 2000,3240.94 2209.21,3031.73 2209.21,2911.35 2184,2886.14 2184,2714.94 2174,2704.94 2174,2491.35 ATmega.28
NetLed1_2: Led1.2 R8.2 | length 204.3
  Top Layer 1 w20: R8.2 3651.58,3690.94 3671.27,3690.94 Led1.2
NetLed2_2: Led2.2 R9.2 | length 241.3
  Top Layer 1 w20: Led2.2 3574.56,1010.5 3673.15,1109.08 R9.2
NetLed3_2: Led3.2 R10.2 | length 239
  Top Layer 1 w20: Led3.2 1115.48,1207.35 R10.2
NetLed4_2: Led4.2 R11.2 | length 209.3
  Top Layer 1 w20: R11.2 1136.97,3606.34 1158.13,3627.51 Led4.2
NetLS1_2: ATmega.12 BUZZ.2 | length 862.3
  Top Layer 1 w20: BUZZ.2 2086.61,1581.55 2465,1959.94 2465,2155.81 ATmega.12
NetP2_1: ATmega.32 P2.1 | length 1835.6
  Top Layer 1 w20: v1(2089,2319.94) 2089,2371.95 ATmega.32
  Bottom Layer 1 w20: v1(2089,2319.94) 2022,2252.94 2022,2095.94 2269.12,1848.82 P2.1
NetQ1_1: Q1.1 R4.2 R13.1 | length 1662.7
  Top Layer 1 w20: Q1.1 1082.64,791.58 v1(1111,819.94) ; v1(1181.1,864.15) R13.1 1259.84,984.25 v1(1318.9,984.25) ; v1(1633,1988.19) R4.2
  Top Layer w20: v1(1111,819.94) 1155.21,864.15 v1(1181.1,864.15)
  Bottom Layer w20: v1(1318.9,984.25) 1318.9,1310.03 1299.21,1329.71 1299.21,1654.4 v1(1633,1988.19)
NetQ2_1: Q2.1 R2.2 R15.1 | length 1887.7
  Top Layer 1 w20: R2.2 v1(2785,2066.93) ; v1(3876,1082.94) 3876.36,1082.57 R15.1 ; Q2.1 v1(3972.2,1082.94)
  Top Layer w20: v1(2785,2066.93) 3143.99,1707.94 3347.2,1707.94 v1(3972.2,1082.94) v1(3876,1082.94)
NetQ3_1: Q3.1 R5.2 R12.1 | length 1964.3
  Top Layer 1 w20: v1(1025,3644.94) R12.1@1025,3820.49 ; R12.1 R12.1@1025,3820.49 ; R5.2 2128.82,2952.76 v1(2129,2952.94) ; R12.1@1025,3820.49 1025,3823.94 920.88,3928.05 Q3.1 900.94,3886.94 967.39,3820.49 R12.1@1025,3820.49
  Bottom Layer 1 w20: v1(1025,3644.94) 1440,3229.94 1852,3229.94 v1(2129,2952.94)
NetQ4_1: Q4.1 R3.2 R14.1 | length 876
  Top Layer 1 w20: R3.2 3478.35,3801.43 3532,3855.09 R14.1 3644.91,3864.94 3711.52,3931.55 Q4.1
NetR2_1: ATmega.13 R2.1 | length 307.4
  Top Layer 1 w20: ATmega.13 2598.42,2066.93 R2.1
NetR3_1: ATmega.10 R3.1 | length 2284.2
  Top Layer 1 w20: ATmega.10 2404.75,2126.97 2404.75,2029.18 2411,2022.94 v1(2411,2020.94) ; v1(3377,3227.94) 3377.41,3228.35 R3.1
  Top Layer w20: v1(2411,2020.94) 2527,2136.94 3319,2136.94 3407,2224.94 3407,3200.94 3380,3227.94 v1(3377,3227.94)
NetR4_1: ATmega.9 R4.1 | length 611.1
  Top Layer 1 w20: R4.1 2030,1988.19 2063.75,2021.94 2288,2021.94 2351.86,2085.8 ATmega.9
NetR5_1: ATmega.1 R5.1 | length 741.9
  Top Layer 1 w20: R5.1 2027.56,2303.66 2040,2291.22 ATmega.1
NetR6_1: ATmega.7 R6.1 U3.1 | length 1390.4
  Top Layer 1 w20: v1(1562.46,2189.94) 1569.33,2183.07 U3.1 ; v1(1916,2132.94) R6.1 ; ATmega.7 2248.86,2162.8 2358.99,2272.94 v1(2395,2272.94)
  Bottom Layer 1 w20: v1(1562.46,2189.94) 1859,2189.94 v1(1916,2132.94) 1916,2280.94 2035,2399.94 2096,2399.94 2197.92,2298.01 2369.92,2298.01 v1(2395,2272.94)
NetR6_2: ATmega.8 R6.2 U3.3 | length 716.1
  Top Layer 1 w20: U3.3 1767,2108.27 1795.61,2079.66 R6.2 2256.85,2079.66 2271.13,2093.94 ATmega.8
NetR7_1: ATmega.17 R7.1 | length 717.8
  Top Layer 1 w20: ATmega.17 2546,2371.95 2668.98,2494.94 2875,2494.94 2897.64,2472.3 R7.1
VCC: ATmega.4 ATmega.6 ATmega.18 C2.1 C5.1 D1.1 D2.1 D3.1 D4.1 IC1.8 J1.3 J2.2 J3.2 J4.2 J5.2 J7.2 J9.1 P2.2 P3.1 R1.2 R8.1 R9.1 R10.1 R11.1 | length 17500.2
  Top Layer 1 w20: J2.2 560,4143.9 533,4116.9 533,3993.94 585,3941.94 757.25,3941.94 847.25,3851.94 D3.1 847.25,3629.19 v1(847,3628.94) ; v1(766.92,872.94) D1.1 v1(766.92,1057.94) ; v1(916.92,3559.01) R11.1 1023,3535.97 ; v1(1052,3513.94) 1045.04,3513.94 1023,3535.97 ; v1(1082.68,3267.72) 1023,3327.39 1023,3535.97 ; v1(1176.05,1057.94) R10.1 1220.47,2045.67 P3.1 ; v1(2177,2122.94) 2177,2135.49 2221.38,2179.87 ATmega.6 ; ATmega.4 2208.55,2250.92 2208.55,2269.94 v1(2209,2269.94) ; C2.1 2186.02,1864.91 v1(2187,1863.94) ; ATmega.18 2519.69,2428.42 v1@2519.69,2644.25 ; R1.2 v1@2519.69,2644.25 ; v1(2520,2643.94) v1@2519.69,2644.25 ; v1(2700.59,2824.53) IC1.8 2700.59,3183.86 J9.1 2883.86,3113.94 2926.93,3070.87 v1(3077,3070.87) C5.1 ; J1.3 3406.75,2555.85 3406.75,2259.94 3378,2231.19 3378,1996.01 P2.2 3472,1902.01 3472,1449.26 R9.1 3720.47,1013.74 3719.67,1012.94 D2.1 3719.67,751.26 3930.3,540.64 J5.2 ; R8.1 3705,3783.51 3749.15,3739.36 D4.1 4037.42,3739.36 4163.59,3865.53 J4.2
  Top Layer w20: J3.2 763.97,872.94 v1(766.92,872.94) ; v1(766.92,1057.94) v1(1176.05,1057.94) ; v1(847,3628.94) v1(916.92,3559.01) ; v1(1052,3513.94) 2568.43,3513.94 2580.14,3502.22 2580.14,3485.65 2503.1,3408.61 2503.1,3369.24 J7.2 2671,3366.14 2671.99,3367.13 J9.1 ; v1(2050,2110.94) 1867,1927.94 1574.42,1927.94 ; v1(2177,2122.94) 1962,1907.94 1594.42,1907.94 ; v1(2187,1863.94) 1638.42,1863.94 1594.42,1907.94 ; P3.1 1385,2117.36 ; P3.1 1338.58,2057.36 1468,1927.94 1530,1927.94 ; P3.1 1385,2163.78 1385,2117.36 ; 1385,2117.36 1385,2072.94 1530,1927.94 ; 1385,2117.36 1574.42,1927.94 ; 1530,1927.94 1550,1907.94 1594.42,1907.94 ; 1530,1927.94 1574.42,1927.94 ; 1574.42,1927.94 1594.42,1907.94
  Bottom Layer w20: v1(1082.68,3267.72) 1165.88,3184.51 1185.56,3184.51 1268,3102.08 1268,2234.36 P3.1 ; v1(2520,2643.94) v1(2700.59,2824.53) ; v1(3077,3070.87) 3077,2885.6 J1.3
  Bottom Layer 1 w20: v1(2050,2110.94) v1(2209,2269.94) ; J9.1 2883.86,3457.8 2969.37,3543.31 3267.72,3543.31 3305.35,3580.94 3650.53,3580.94 J4.2
pads on no net: ATmega.2 ATmega.19 ATmega.22 ATmega.23 ATmega.24 ATmega.25 ATmega.26 IC1.2 IC1.3 IC1.4 IC1.6 IC1.7 IC1.9 J1.2 J6.1 J6.9 J6.10

## Silkscreen, mask and mechanical layers (free items; w line width, h text height)
Mechanical 2:
  circle w0.25: c2362.45,2356.39 r0.12
  circle w0.25: c2362.45,2356.39 r0.12
  lines w0.5: 118.36,4206.78 551.43,4561.12 ; 157.73,545.37 551.43,151.67 ; 393.95,387.89 4330.96,4324.89 ; 393.95,4324.89 4330.96,387.89 ; 4173.48,151.67 4567.18,545.37 ; 4173.48,4561.12 4567.18,4167.41 ; 0.25,72.93 ccw(c-289.4,514.43) 236.47,466.63 cw(c354.58,348.52) 472.69,230.41 ccw(c571.12,-379.83) 78.99,-5.81 393.95,-5.81 787.65,387.89 cw(c2362.45,-793.21) 3937.26,387.89 4330.96,-5.81 4645.92,-5.81 ccw(c4206.28,-293.23) 4251.86,230.05 cw(c4369.97,348.52) 4488.44,466.63 ccw(c4866.03,425.47) 4724.66,72.93 4724.66,387.89 4330.96,781.59 cw(c5512.06,2356.39) 4330.96,3931.19 4724.66,4324.89 4724.66,4639.86 ccw(c5014.31,4198.35) 4488.44,4246.16 cw(c4370.33,4364.27) 4252.22,4482.38 ccw(c4259.31,4916.75) 4645.92,4718.6 4330.96,4718.6 3937.26,4324.89 cw(c2362.45,5506) 787.65,4324.9 393.95,4718.6 78.99,4718.6 ccw(c433.32,4923.32) 512.06,4521.75 cw(c378.01,4380.2) 236.47,4246.16 ccw(c-289.4,4198.35) 0.25,4639.86 0.25,4324.89 393.95,3931.19 cw(c-787.15,2356.39) 393.95,781.59 0.25,387.89 0.25,72.93